# Altium PCB PCB.PcbDoc
Units mil, origin at the board's own origin, x right, y up, seen from the top; angles counter-clockwise.
Board outline 6000 x 4000 mil, 2 copper layers (Top Layer, Bottom Layer); 24 components, 25 nets, 113 pads, 9 vias.
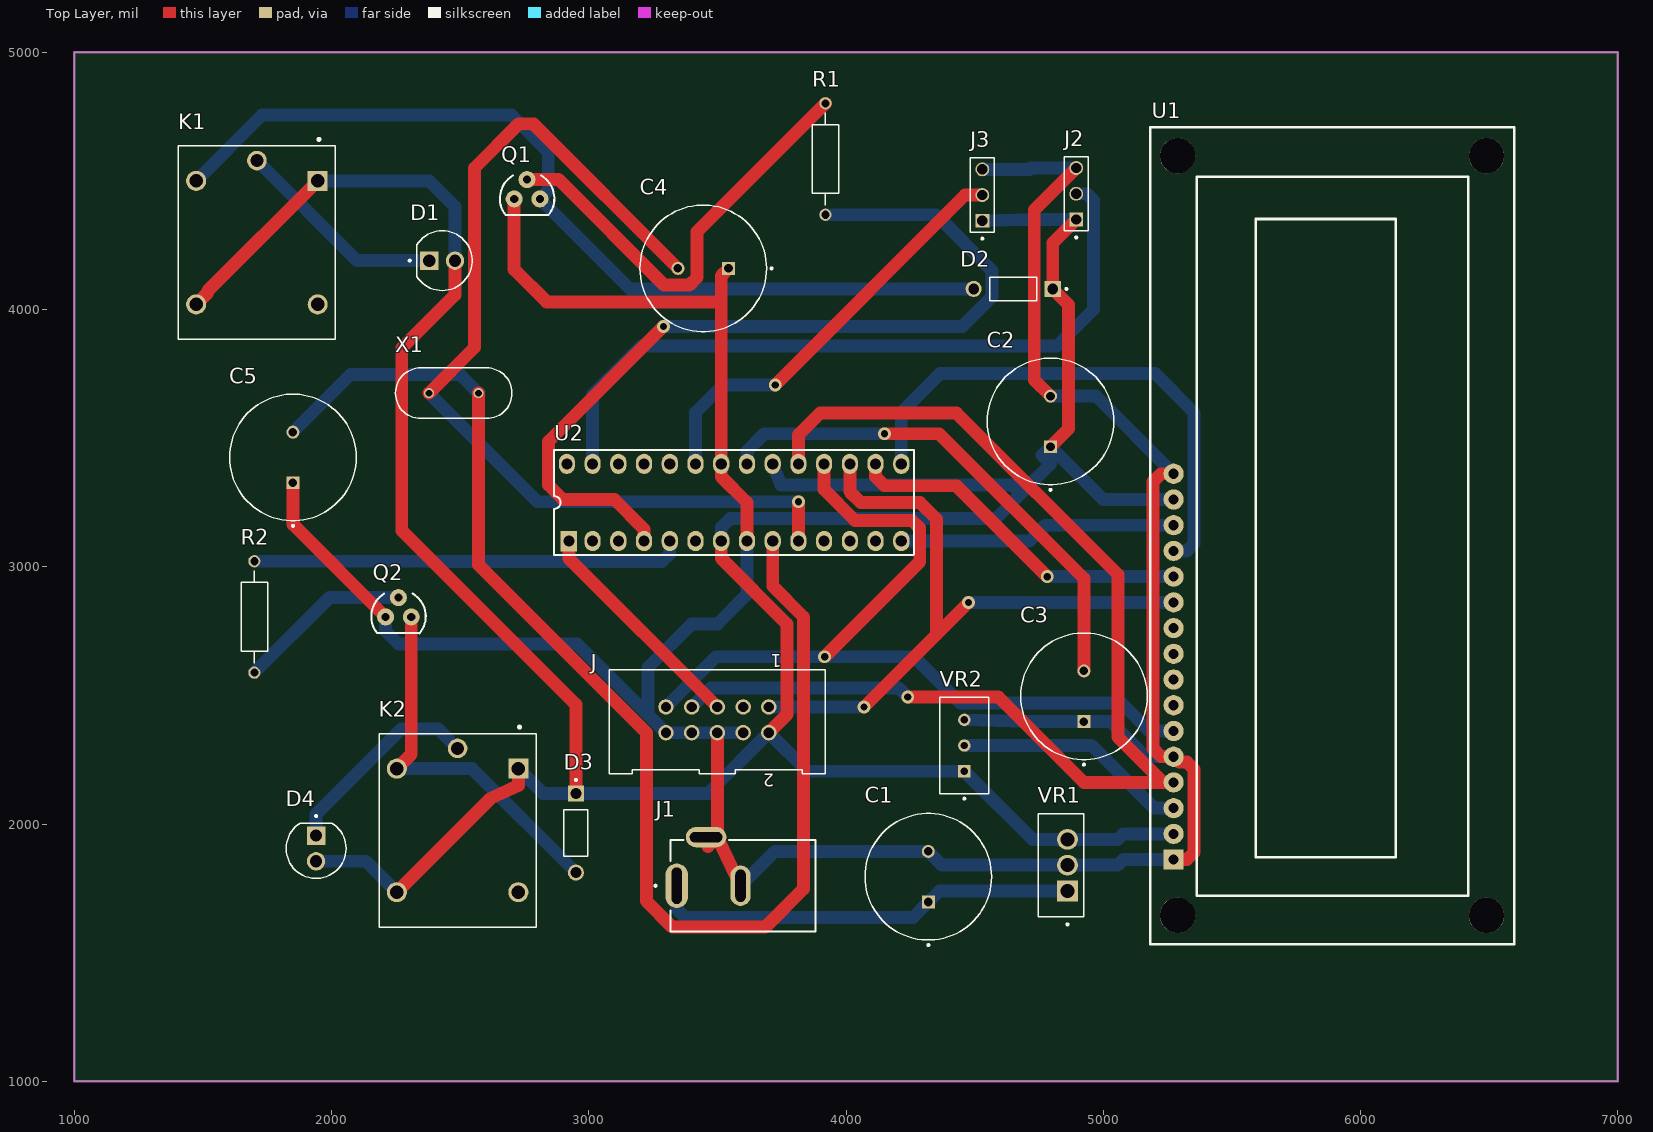
[diagram p0: Top Layer view]
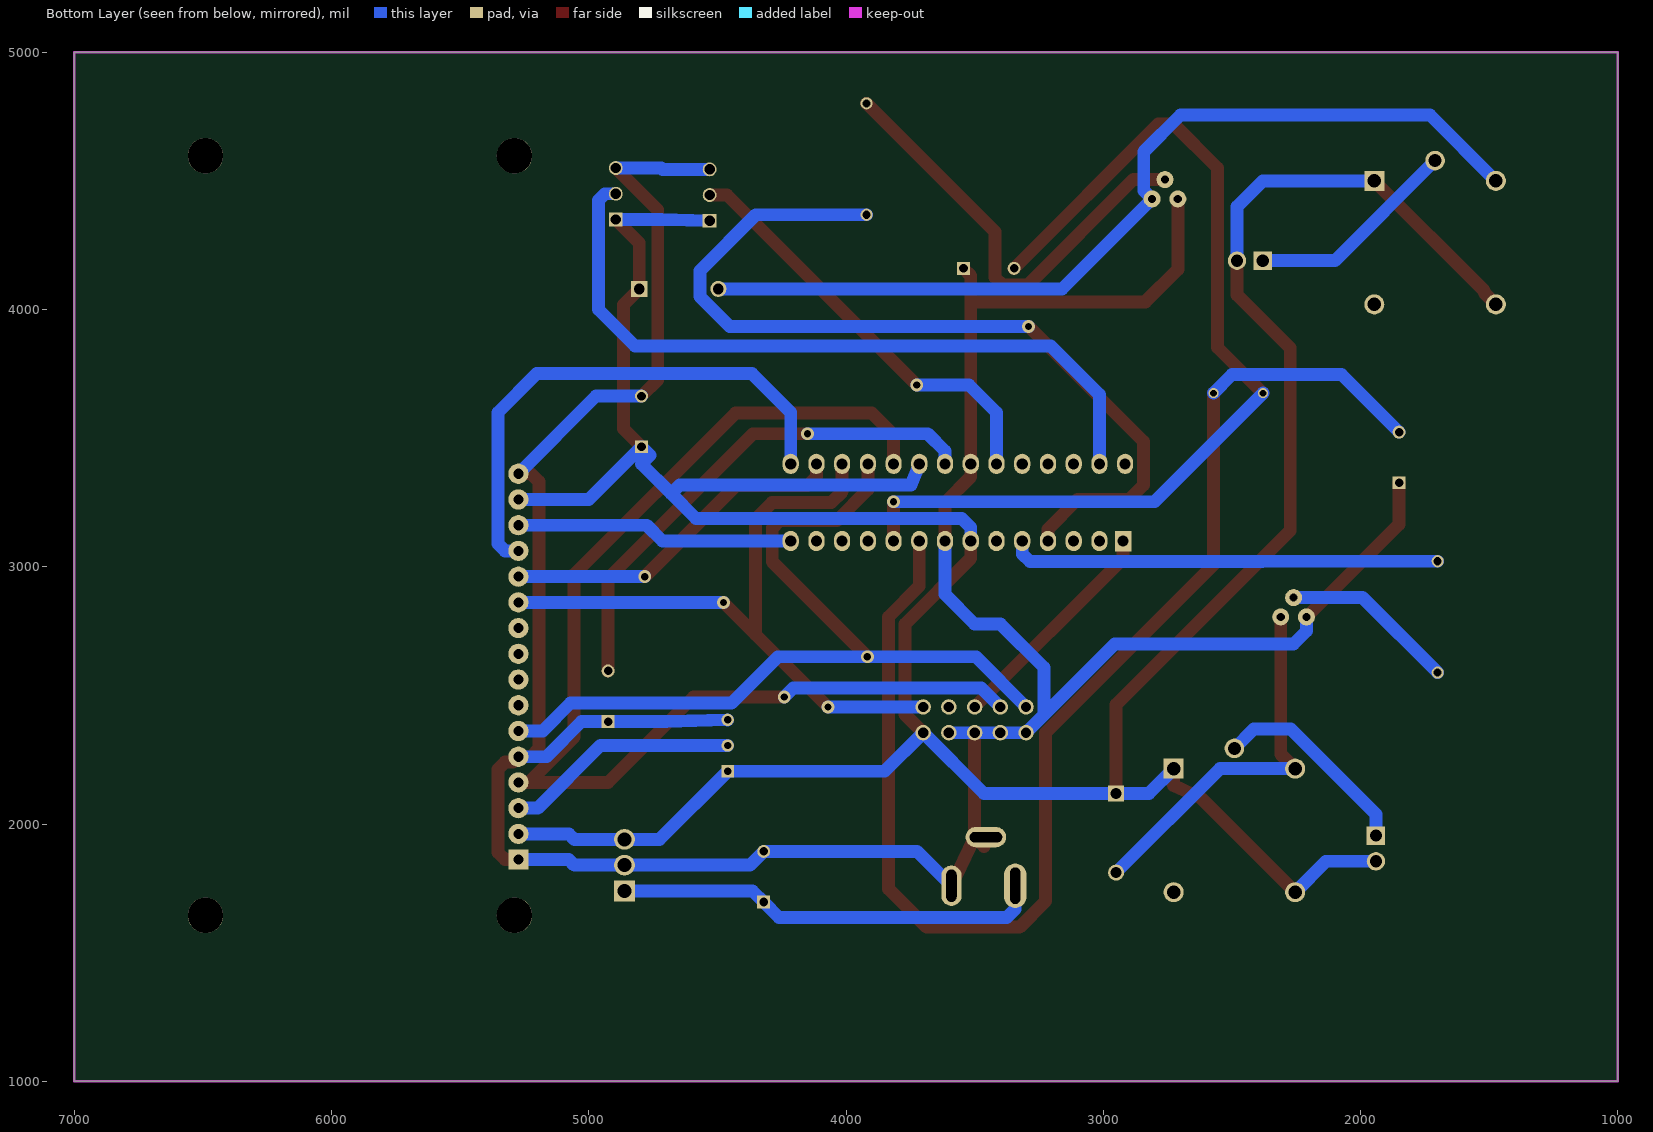
[diagram p1: Bottom Layer view, seen from below]
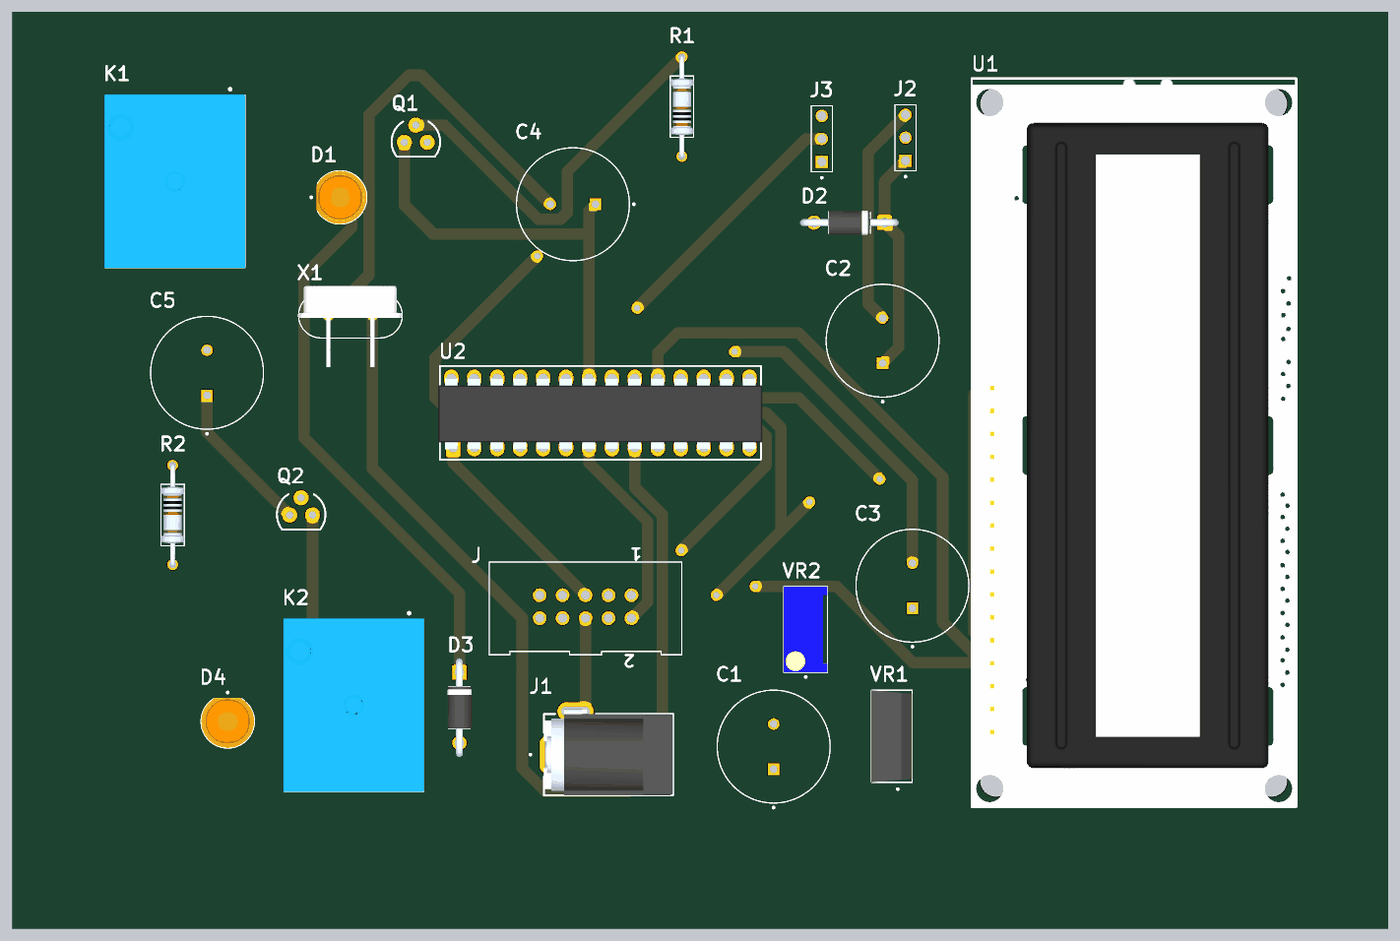
[diagram p2: 3D render of the assembled board from above, using the file's embedded part models]

## Layer stack, top to bottom
Top Solder: solder mask 0.4, Solder Resist, Dk 3.5
Top Layer: signal copper 1.4
Dielectric 1: dielectric 12.6, FR-4, Dk 4.8
Bottom Layer: signal copper 1.4
Bottom Solder: solder mask 0.4, Solder Resist, Dk 3.5

## Board outline
1000,1000 1000,5000 7000,5000 7000,1000

## Design rules (kind name [scope] priority, off if disabled: settings)
Clearance [All] p1: gap=15 ignorepadtopadclearanceinfootprint=FALSE
PolygonConnect [All] p1: connectstyle=Relief reliefconductorwidth=10 reliefentries=4 polygonreliefangle="90 Angle" airgapwidth=10
RoutingVias [All] p1: holewidth=28 width=50 viastyle="Through Hole" minholewidth=28 minwidth=50 maxholewidth=28 maxwidth=50
SolderMaskExpansion [All] p1: expansion=4 istentingtop=FALSE
SupplyNets "Schematic Supply Nets_1" [InNet('GND')] p1: voltage=0.000
SupplyNets "Schematic Supply Nets" [InNet('VCC')] p2: voltage=0.000
Width [All] p1: maxlimit=75 minlimit=25 preferedwidth=50
30 further rules are at their usual default settings.

## Components (designator, comment, footprint, x,y, rotation, side; value= is the part's Value field where it differs from the comment)
C1 "0.33u" CAPPRD500W60D1330H2700 4320,1795 r90 top
C2 "0.1u" CAPPRD500W60D1330H2700 4795,3565 r90 top
C3 "Capacitor" CAPPRD500W60D1330H2700 4925,2496.57 r90 top value=0.1u
C4 "Capacitor" CAPPRD500W60D1330H2700 3445,4160 r180 top value=0.1u
C5 "Capacitor" CAPPRD500W60D1330H2700 1850,3425 r90 top value=0.1u
D1 "L08R5000Q1" LEDRD254W57D500H1070 2430,4190 r0 top
D2 "1N4007-T" DIOAD780W78L463D236 4650,4080 r180 top
D3 "1N4007-T" DIOAD780W78L463D236 2950,1965 r270 top
D4 "L08R5000Q1" LEDRD254W57D500H1070 1940,1905 r270 top
J "TST-105-XX-X-D" TST-105-XX-X-D 3500,2405 r180 top
J1 "DCJ200-10-A-XX-K_REVA" GCT_DCJ200-10-A-XX-K_REVA 3599.84,1760 r90 top
J2 "TE_644884-3" TE_644884-3 4895,4350 r90 top
J3 "TE_644884-3" TE_644884-3 4530,4345 r90 top
K1 "SRD-05VDC-SL-C" RELAY_SRD-05VDC-SL-C 1710,4260 r270 top
K2 "SRD-05VDC-SL-C" RELAY_SRD-05VDC-SL-C 2490,1975 r270 top
Q1 "Bipolar NPN 3 Pins Transistor VBIC Model" TO92 2760,4430 r0 top
Q2 "Bipolar NPN 3 Pins Transistor VBIC Model" TO92 2260,2805 r0 top
R1 "Resistor" RESAD1100W55L680D260 3920,4585 r90 top value=1K
R2 "Resistor" RESAD1100W55L680D260 1700,2805 r270 top value=1K
U1 "DISPLAY_LCD_16x2" DISPLAY_LCD_16_2 5881.71,3121.37 r90 top
U2 "ATMEGA328P-PU" 27_DIP_7.62mm 2922.48,3099.61 r90 top
VR1 "L7805" TO255P1020X450X2000-3 4835,1840 r90 top
VR2 "3296W-1-250" TRIM_3296W-1-250 4460,2305 r90 top
X1 "Crystal" XTAL_HC49P488W46L1150T500H350 2475,3675 r180 top

## Footprints (in the part's own frame and the unit in brackets; to place one, negate y for a bottom-side part, rotate by r counter-clockwise, add the part's x,y. Pads: shape width x height; smd on the part's side, far side on the other; paste and mask are expansions set on the pad)
27_DIP_7.62mm [mm]
  rect 2x1.6 hole 1.1: 1(0,0)
  oval 2x1.6 hole 1.1: 2(0.01,-2.35) 3(0.01,-4.89) 4(0.01,-7.43) 5(0.01,-9.97) 6(0.01,-12.51) 7(0.01,-15.05) 8(0.01,-17.59) 9(0.01,-20.13) 10(0.01,-22.67) 11(0.01,-25.21) 12(0.01,-27.75) 13(0.01,-30.29) 14(0.01,-32.83) 15(7.63,-32.83) 16(7.63,-30.29) 17(7.63,-27.75) 18(7.63,-25.21) 19(7.63,-22.67) 20(7.63,-20.13) 21(7.63,-17.59) 22(7.63,-15.05) 23(7.63,-12.51) 24(7.63,-9.97) 25(7.63,-7.43) 26(7.63,-4.89) 27(7.63,-2.35) 28(7.63,0.19)
  silkscreen extent -1.35,-34.1 9.02,1.46, body extent -0.23,-34.26 7.65,1.68, height 4.65
CAPPRD500W60D1330H2700 [mm]
  rect 1.28x1.28 hole 0.85: 1(-2.5,0)
  round 1.28 hole 0.85: 2(2.5,0)
  silkscreen extent -6.85,-6.25 6.25,6.25
DIOAD780W78L463D236 [mm]
  round 1.59 hole 1.06: A(3.904,0)
  rect 1.59x1.59 / inner round 1.59 / far side rect 1.59x1.59 hole 1.06: K(-3.904,0)
  silkscreen extent -5.35,-1.18 2.32,1.18, body extent -5.47,-1.35 5.47,1.35, height 2.69
DISPLAY_LCD_16_2 [mm]
  rect 2x2 hole 1: 1(-31.999,15.451)
  round 2 hole 1: 2(-29.459,15.451) 3(-26.919,15.451) 4(-24.379,15.451) 5(-21.839,15.451) 6(-19.299,15.451) 7(-16.759,15.451) 8(-14.219,15.451) 9(-11.679,15.451) 10(-9.139,15.451) 11(-6.599,15.451) 12(-4.059,15.451) 13(-1.519,15.451) 14(1.021,15.451) 15(3.561,15.451) 16(6.101,15.451)
  round 3.5 hole 3.5 unplated: ""(-37.5,-15.451) ""(-37.5,15.049) ""(37.5,-15.451) ""(37.5,15.05)
  silkscreen extent -40.35,-18.2 40.3,17.74, body extent -40.35,-18.26 40.35,17.74, height 12
GCT_DCJ200-10-A-XX-K_REVA [mm]
  oval 4.4x2.2 hole 1 slot 3.6 at 0 deg: 1(0,6.55)
  oval 4x2 hole 1 slot 3.2 at 0 deg: 2(0,0.25)
  oval 2x4 hole 1 slot 3.2 at 90 deg: 3(4.8,3.65)
  silkscreen extent -4.5,-7.15 4.5,8.75, body extent -4.5,-7.15 5.05,7.15, height 11
LEDRD254W57D500H1070 [mm]
  round 1.815 hole 1.21: A(1.27,0)
  rect 1.815x1.815 / inner round 1.815 / far side rect 1.815x1.815 hole 1.21: C(-1.27,0)
  silkscreen extent -3.3,-2.96 2.96,2.96, body extent -2.6,-2.95 2.95,2.95, height 9.1
RELAY_SRD-05VDC-SL-C [mm]
  rect 1.98x1.98 / inner round 1.98 / far side rect 1.98x1.98 hole 1.32: A1(-6.1,6)
  round 1.98 hole 1.32: A2(-6.1,-6) NC(6.1,6) NO(6.1,-6)
  round 1.935 hole 1.29: COM(-8.1,0)
  silkscreen extent -10.3,-7.75 9.55,7.75, body extent -9.6,-7.8 9.6,7.8, height 15.8
RESAD1100W55L680D260 [mm]
  round 1.2 hole 0.8: 1(-5.5,0) 2(5.5,0)
  silkscreen extent -4.58,-1.3 4.58,1.3, body extent -5.77,-1.3 5.77,1.3, height 2.6
TE_644884-3 [mm]
  rect 1.37x1.37 hole 1.02: 1(0,0)
  round 1.37 hole 1.02: 2(2.54,0) 3(5.08,0)
  silkscreen extent -1.87,-1.17 6.2,1.17
TO92 [mil]
  round 66 hole 32: 1(50,0) 2(0,75) 3(-50,0)
  silkscreen extent -105,-63 106,90
TO255P1020X450X2000-3 [mm]
  rect 2.055x2.055 / inner round 2.055 / far side rect 2.055x2.055 hole 1.37: 1(-2.55,-0.662)
  round 2.055 hole 1.37: 2(0,-0.662) 3(2.55,-0.662)
  silkscreen extent -5.95,-2.25 5.1,2.25, body extent -5.1,-2.25 5.1,2.25, height 20
TRIM_3296W-1-250 [mm]
  rect 1.218x1.218 / inner round 1.218 / far side rect 1.218x1.218 hole 0.71: 1(-2.54,0)
  round 1.218 hole 0.71: 2(0,0) 3(2.54,0)
  silkscreen extent -5.35,-2.41 4.76,2.42, body extent -4.76,-2.41 4.76,2.42, height 11.55
TST-105-XX-X-D [mil]
  round 60 hole 40: 1(-200,-50) 2(-200,50) 3(-100,-50) 4(-100,50) 5(0,-50) 6(0,50) 7(100,-50) 8(100,50) 9(200,-50) 10(200,50)
  silkscreen extent -420,-195 420,210
XTAL_HC49P488W46L1150T500H350 [mil]
  round 39.65 hole 25.87: 1(-96.06,0) 2(96.06,0)
  silkscreen extent -226,-98 226,98, body extent -226,-128 226,226, height 98

## Part data
C1 C2: library part 478CKS010M, "4700ÂµF 10V Aluminum Electrolytic Capacitors Radial, Can 98.8mOhm @ 120Hz 2000 Hrs @ 85Â°C", Package="Radial Illinois Capacitor", Availability=Warning, MF="Illinois Capacitor", Mouser-Purchase-URL=https://snapeda.com/shop?store=Mouser&id=2347563, MP=478CKS010M, Price=None, SnapEDA_Link=https://www.snapeda.com/parts/478CKS010M/Illinois%20Capacitor/view-part/2347563/?ref=snap
D1 D4: "LED, 5MM, ORANGE; LED / Lamp Size: 5mm / T-1 3/4; LED Colour: Orange; Typ Luminous Intensity: 4.3mcd; Viewing Angle: ...", Package=None, Availability="In Stock", Check_prices=https://www.snapeda.com/parts/L08R5000Q1/LED+Technology/view-part/?ref=eda, MF="LED Technology", MP=L08R5000Q1, Price=None, SnapEDA_Link=https://www.snapeda.com/parts/L08R5000Q1/LED+Technology/view-part/?ref=snap
D2 D3: "Diode Standard 1A 1000V 1Vf DO41", Package="DO-41 Diodes Inc.", Check_prices=https://www.snapeda.com/parts/1N4007-T/Diodes+Inc./view-part/?ref=eda, MF="Diodes Incorporated", MP=1N4007-T, SnapEDA_Link=https://www.snapeda.com/parts/1N4007-T/Diodes+Inc./view-part/?ref=snap
J: "Connector Header Through Hole 10 position 0.100 _2.54mm_", Package=None, Availability=Unavailable, MF=Samtec, MP=TST-105-02-F-D, Price=None, SnapEDA_Link=https://www.snapeda.com/parts/TST-105-02-F-D/Samtec%20Inc./view-part/787167/?ref=snap
J1: "Power Barrel Connector Jack 2.05mm ID (0.081), 5.50mm OD (0.217) Through Hole, Right Angle", Package=None, Check_prices=https://www.snapeda.com/parts/DCJ200-10-A-K1-K/Global+Connector+Technology/view-part/?ref=eda, MF="Global Connector Technology", MP=DCJ200-10-A-K1-K, SnapEDA_Link=https://www.snapeda.com/parts/DCJ200-10-A-K1-K/Global+Connector+Technology/view-part/?ref=snap
J2 J3: library part 644884-3, Package=None, Availability=Unavailable, MP=644884-3, Price=None
K1 K2: "5V Trigger Relay Module For Arduino And Raspberry Pi 5V Trigger Relay Module For Arduino And Raspberry Pi", Package="NON STANDARD-5 Songle Relay", Availability="Not in stock", Check_prices=https://www.snapeda.com/parts/SRD-05VDC-SL-C/Songle+Relay/view-part/?ref=eda, MF="Songle Relay", MP=SRD-05VDC-SL-C, Price=None, SnapEDA_Link=https://www.snapeda.com/parts/SRD-05VDC-SL-C/Songle+Relay/view-part/?ref=snap
Q1 Q2: library part "BJT NPN VBIC", AFN=1, AJC=-0.5, AJE=-0.5, AJS=-0.5, ART=0.1, AVC1=0, AVC2=0, BFN=1, CBCO=0, CBEO=0, CCSO=0, CJC=0, CJCP=0, CJE=0, CJEP=0, CTH=0, DEAR=0, EA=1.12, EAIC=1.12, EAIE=1.12, EAIS=1.12, EANC=1.12, EANE=1.12, EANS=1.12, EAP=1.12, EBBE=0, FC=0.9, GAMM=0, HRCF=1, IBBE=1e-06, IBCI=1e-16, IBCIP=0, IBCN=0, IBCNP=0, IBEI=1e-18, IBEIP=0, IBEN=0, IBENP=0, IKF=0, IKP=0, IKR=0, IS=1e-16, ISP=0, ISRR=1, ITF=0, KFN=0, MC=0.33, ME=0.33, MS=0.33, NBBE=1, NCI=1, NCIP=1, NCN=2, NCNP=2, NEI=1, NEN=2, NF=1, NFP=1, NKF=0.5, NR=1, PC=0.75, PE=0.75, PS=0.75, QBM=0, QCO=0, QTF=0, RBI=0.1, RBP=0.1, RBX=0, RCI=0.1, RCX=0, RE=0, RS=0, RTH=0, SimulationGenericComponent=True, TAVC=0, TD=0, TF=0, TNBBE=0, TNF=0, TNOM=27, TR=0, TVBBE1=0, TVBBE2=0, VBBE=0, VEF=0, VER=0, VERS=1.2, VO=0, VREF=0, VRT=0, VTF=0, WBE=1, WSP=1, XII=3, XIKF=0, XIN=3, XIS=3, XISR=0, XRBI=0, XRBP=0, XRBX=0, XRCI=0, XRCX=0, XRE=0, XRS=0, XTF=0, XVO=0
U1: library part DISPLAY_LCD_16_2, "Display LCD 16x2 I2C."
U2: "ATMEGA328P-PU; 8 bit Microcontroller AVR 20MHz 1; 32kb Flash; 2kb RAM; I2C SPI 2", Case/Package=PDIP, Frequency=20MHz, Manufacturer="Microchip / Atmel", Max Operating Temperature=85°C, Max Supply Voltage=5.5V, Min Operating Temperature=-40°C, Min Supply Voltage=1.8V, Package Quantity=14, Supplier Part Number 1=ATMEGA328P-PU-ND, Category=Microcontrollers, ComponentLink1Description=https://datasheet.ciiva.com/20168/73-4283-20168380.pdf?src-supplier=Rapid+Electronics, ComponentLink1URL=https://datasheet.ciiva.com/20168/73-4283-20168380.pdf?src-supplier=Rapid+Electronics, ComponentLink2Description=https://datasheet.ciiva.com/19457/2139111-19457070.pdf?src-supplier=Jameco, ComponentLink2URL=https://datasheet.ciiva.com/19457/2139111-19457070.pdf?src-supplier=Jameco, ComponentLink3Description=https://datasheet.ciiva.com/1157/1684409-1157696.pdf?src-supplier=Element14, ComponentLink3URL=https://datasheet.ciiva.com/1157/1684409-1157696.pdf?src-supplier=Element14, ComponentLink4Description=https://datasheet.ciiva.com/26818/atmega328p-pu-26818578.pdf?src-supplier=IIIC, ComponentLink4URL=https://datasheet.ciiva.com/26818/atmega328p-pu-26818578.pdf?src-supplier=IIIC, ComponentLink5Description=https://datasheet.ciiva.com/29119/155197-da-01-en-microcontr-atmega328p-pu-8bit-pdip-28-29119593.pdf?src-supplier=Conrad, ComponentLink5URL=https://datasheet.ciiva.com/29119/155197-da-01-en-microcontr-atmega328p-pu-8bit-pdip-28-29119593.pdf?src-supplier=Conrad, ComponentLink6Description=https://datasheet.ciiva.com/15213/getdatasheetpartid-318533-15213133.pdf?src-supplier=Verical, ComponentLink6URL=https://datasheet.ciiva.com/15213/getdatasheetpartid-318533-15213133.pdf?src-supplier=Verical, Contact Plating=Tin,Matte, Core Architecture=AVR, Data Bus Width=8b, Height=3.28mm, Interface=I2C,SPI,UART,USART,2-Wire, Lead Free="Lead Free", Length=37.4mm, Manufacturer Part Number=ATMEGA328P-PU, Max Frequency=20MHz, Memory Size=32KB, Memory Type=FLASH, Mount="Through Hole", Number of ADC Channels=6, Number of I2C Channels=1, Number of I/Os=23, Number of Pins=28, Number of Programmable I/O=23, Number of PWM Channels=6, Number of SPI Channels=1, Number of Timers/Counters=3, Oscillator Type=Internal, Packaging=Rail/Tube, Peripherals="Brown-out Detect/Reset,POR,PWM,WDT", Pricing 1="1=2,08000, 25=1,91000, 100=1,73000 (USD)", Radiation Hardening=No, RAM Size=2KB, REACH SVHC="No SVHC", RoHS=Yes, Stock 1=5280, Supplier 1=Digi-Key, Watchdog Timer=Yes, Width=6.76mm
VR1: "Standard Regulator Pos 5V 1.5A 3-Pin(3+Tab) TO-220FP Tube", Package=None, Availability="Not in stock", Check_prices=https://www.snapeda.com/parts/L7805/STMicroelectronics/view-part/?ref=eda, MF=STMicroelectronics, MP=L7805, Price=None, SnapEDA_Link=https://www.snapeda.com/parts/L7805/STMicroelectronics/view-part/?ref=snap
VR2: "25 Ohms 0.5W, 1/2W PC Pins Through Hole Trimmer Potentiometer Cermet 25.0 Turn Top Adjustment", Package="NON STANDARD-3 Bourns", Availability="In Stock", Check_prices=https://www.snapeda.com/parts/3296W-1-250/Bourns/view-part/?ref=eda, MF=Bourns, MP=3296W-1-250, Price=None, Purchase-URL=https://pricing.snapeda.com/search/part/3296W-1-250/?ref=eda, SnapEDA_Link=https://www.snapeda.com/parts/3296W-1-250/Bourns/view-part/?ref=snap
C3 C4 C5: SimulationGenericComponent=True
R1 R2: SimulationGenericComponent=True, TC1=0, TC2=0
X1: F0=16MHz, Q=50K, R=500, SimulationGenericComponent=True

## Via types
v1: diameter 50, hole 28, Top Layer to Bottom Layer, 9 vias

## Nets (pads, with @x,y where several pads share a name; then routed paths per layer and width w, separated by ;. In a path a pad name is that pad's centre, name@x,y a point inside that pad or via, vN(x,y) a via of type N, cw(c..) or ccw(c..) an arc to the next point about the centre after c; other vN are vias at no path point)
D4: J.1 U1.11 U2.17 | length 2679.3
  Top Layer w50: U2.17 4015,3292 4057.29,3249.71 4287,3249.71 4351.5,3185.21 4351.5,2736.5 ; v1(4070,2455) 4351.5,2736.5 ; v1(4476.57,2861.57) 4351.5,2736.5
  Bottom Layer w50: J.1 v1(4070,2455) ; v1(4476.57,2861.57) U1.11
D5: U1.12 U2.16 | length 1369.3
  Top Layer w50: U2.16 4115,3350 4150,3315 4429,3315 v1(4782.43,2961.57)
  Bottom Layer w50: v1(4782.43,2961.57) U1.12
D6: U1.13 U2.15 | length 2064.7
  Bottom Layer w50: U2.15 4215,3600 4366,3751 5202,3751 5353,3600 5353,3089.57 5325,3061.57 U1.13
D7: U1.14 U2.14 | length 1083.9
  Bottom Layer w50: U2.14 4713,3100 4774.57,3161.57 U1.14
E: J.9 U1.6 U2.18 | length 3360.3
  Top Layer w50: U2.18 3915,3300 4035,3180 4256.5,3180 4286.5,3150 4286.5,3019.5 v1(3917,2650)
  Bottom Layer w50: J.9 3495,2650 v1(3917,2650) 4264.5,2650 4444.5,2470 5070.52,2470 5178.95,2361.57 U1.6
GND: C1.2 C2.2 C3.1 C4.1 C5.1 J1.2 J1.3 J2.3 J3.3 J.4 J.6 J.8 J.10 Q1.3 Q2.3 U1.1 U1.5 U1.16 U2.8 U2.22 VR1.2 VR2.3 | length 12491.4
  Top Layer w50: C5.1 1850,3165 Q2.3 ; Q1.3 2710,4156 2836.2,4029.8 3515,4029.8 ; J.6 J1.3@3500,1948.98 ; C4.1 3515,4131.58 3515,4029.8 ; J1.2 J1.3@3500,1948.98 ; U2.8 3615,3250 3515,3350 U2.22 3515,4029.8 ; C2.2 4732,3726.43 4732,4387 J2.3 ; U1.1 5325,1861.57 5353,1889.57 5353,2213 5325,2241 5293.99,2241 U1.5 5225,2261.57 5194,2292.57 5194,3331 5224.57,3361.57 U1.16 ; J1.3@3500,1948.98 3464.01,1912.99 J1.3 J1.3@3500,1948.98
  Bottom Layer w50: Q2.3 2210,2750 2260,2700 2955,2700 3230,2425 ; J1.2 3723.43,1893.43 C1.2 4373.43,1840 VR1.2 5056,1840 5077.57,1861.57 U1.1 ; J.4 J.6 J.8 J.10 3230,2425 ; U2.8 3615,2893 3500,2778 3400,2778 3230,2608 3230,2425 ; VR2.3 4698.85,2398.15 C3.1 5027.85,2398.15 5164.43,2261.57 U1.5 ; J3.3 4713,4545 4718,4550 J2.3 ; C2.2 4971.56,3663.43 U1.16
IR1: J2.2 U2.27 | length 2855.5
  Bottom Layer w50: U2.27 3015,3669 3204,3858 4820,3858 4962,4000 4962,4425 4937,4450 J2.2
IR2: J3.2 U2.23 | length 1665
  Top Layer w50: v1(3725,3707) 4463,4445 J3.2
  Bottom Layer w50: U2.23 3415,3600 3522,3707 v1(3725,3707)
NC: J.3
NetC1_1: C1.1 J1.1 VR1.1 | length 1665.3
  Bottom Layer w50: J1.1 3341.97,1670.03 3375,1637 4260.42,1637 C1.1 4363.03,1739.61 VR1.1
NetC3_2: C3.2 U2.21 | length 1980
  Top Layer w50: v1(4150,3517) 4362,3517 4925,2954 C3.2
  Bottom Layer w50: U2.21 3615,3450 3682,3517 v1(4150,3517)
NetC4_2: C4.2 U2.10 X1.2 | length 3806.8
  Top Layer w50: X1.2 2556,3852.06 2556,4550 2728,4722 2784.57,4722 C4.2 ; U2.10 v1(3815,3253)
  Bottom Layer w50: X1.2 2800.94,3253 v1(3815,3253)
NetC5_2: C5.2 U2.9 X1.1 | length 5205.2
  Top Layer w50: X1.1 2571.06,3007.94 3224,2355 3224,1700 3325,1599 3686,1599 3835,1748 3835,2805 3715,2925 U2.9
  Bottom Layer w50: C5.2 2073.57,3747 2499.06,3747 X1.1
NetD1_C: D1.C K1.COM | length 831.1
  Bottom Layer w50: K1.COM 2098.9,4190 D1.C
NetD2_A: D2.A K1.A2 Q1.1 | length 3561.9
  Bottom Layer w50: K1.A2 1729.62,4756 2700,4756 2842.5,4613.5 2842.5,4462.5 Q1.1 3160,4080 D2.A
NetD3_A: D3.A K2.A2 Q2.1 | length 1476.6
  Top Layer w50: K2.A2 2310,2271.38 Q2.1
  Bottom Layer w50: K2.A2 2546.12,2215.16 D3.A
NetD4_C: D4.C K2.COM | length 801.2
  Bottom Layer w50: D4.C 1940,2038 2271,2369 2414.9,2369 K2.COM
NetQ1_2: Q1.2 R1.2 | length 1726.6
  Top Layer w50: Q1.2 2883,4505 3293.2,4094.8 3390.8,4094.8 3421,4125 3421,4302.54 R1.2
NetQ2_2: Q2.2 R2.2 | length 680.8
  Bottom Layer w50: R2.2 1991.54,2880 Q2.2
NetU1_3: U1.3 VR2.2 | length 914.3
  Bottom Layer w50: VR2.2 4955,2305 5198.43,2061.57 U1.3
Relay1: R1.1 U2.4 | length 3455.5
  Top Layer w50: U2.4 3215,3146 3100,3261 2900,3261 2843,3318 2843,3487 v1(3290,3934)
  Bottom Layer w50: v1(3290,3934) 4452,3934 4568,4050 4568,4151 4350.53,4368.47 R1.1
Relay2: R2.1 U2.5 | length 1678.1
  Bottom Layer w50: R2.1 2379.47,3021.53 2381,3020 3285,3020 3315,3050 U2.5
RS: J.7 U1.4 U2.19 | length 4588
  Top Layer w50: U2.19 3815,3513 3900,3598 4429,3598 5057,2970 5057,2337.65 5233.08,2161.57 ; v1(4240,2494) 4593,2494 4925.43,2161.57 5233.08,2161.57 ; U1.4 5233.08,2161.57
  Bottom Layer w50: J.7 3474,2529 4205,2529 v1(4240,2494)
RST: J.5 U2.1 | length 883.8
  Top Layer w50: U2.1 2922.48,3032.52 J.5
VCC: C2.1 D1.A D2.K D3.K D4.A J2.1 J3.1 J.2 K1.A1 K1.NO K2.A1 K2.NO U1.2 U1.15 U2.7 U2.20 VR1.3 VR2.1 | length 13175.3
  Top Layer w50: K1.NO 1519,4065.06 1519,4072.94 K1.A1 ; K2.NO 2618.94,2100 2726.22,2150 K2.A1 ; D1.A 2480,4057 2273,3850 2273,3141 2950,2464 D3.K ; U2.7 3515,3033 3770,2778 3770,2425 J.2 ; C2.1 4865,3536.58 4865,4018.72 D2.K 4803.72,4258.72 J2.1
  Bottom Layer w50: D4.A 2133.62,1855 K2.NO ; K1.A1 2379.84,4500.16 2480,4400 D1.A ; K2.A1 2822.66,2118.72 D3.K 3463.72,2118.72 J.2 3850,2205 VR2.1 4724.61,1940.39 VR1.3 5056,1940.39 5077.18,1961.57 U1.2 ; U2.7 3515,3153 3550,3188 4583,3188 4679.71,3284.71 ; U2.20 3747,3318 4646.42,3318 4679.71,3284.71 ; J3.1 4718,4350 J2.1 ; U1.15 5000.01,3261.57 C2.1 4761.71,3433.29 4795,3400 4679.71,3284.71
pads on no net: K1.NC K2.NC U1. U1.7 U1.8 U1.9 U1.10 U2.2 U2.3 U2.6 U2.11 U2.12 U2.13 U2.24 U2.25 U2.26 U2.28

## Keep-outs
Keep-Out Layer:
  lines w10: 1125,5000 1000,5000 ; 1000,5000 1000,1000 7000,1000 7000,5000 1000,5000

## Text inside footprints (layer, text, board x,y; h text height)
J: Top Overlay "2" at 3720.3,2194.71 h50.07 r180; Top Overlay "1" at 3750,2660 h50.08 r180